# Altium PCB PCB smart home.PcbDoc
Units mm, origin at the board's own origin, x right, y up, seen from the top; angles counter-clockwise.
Board outline 80.26 x 53.85 mm, 2 copper layers (Top Layer, Bottom Layer); 23 components, 35 nets, 125 pads, 28 vias.
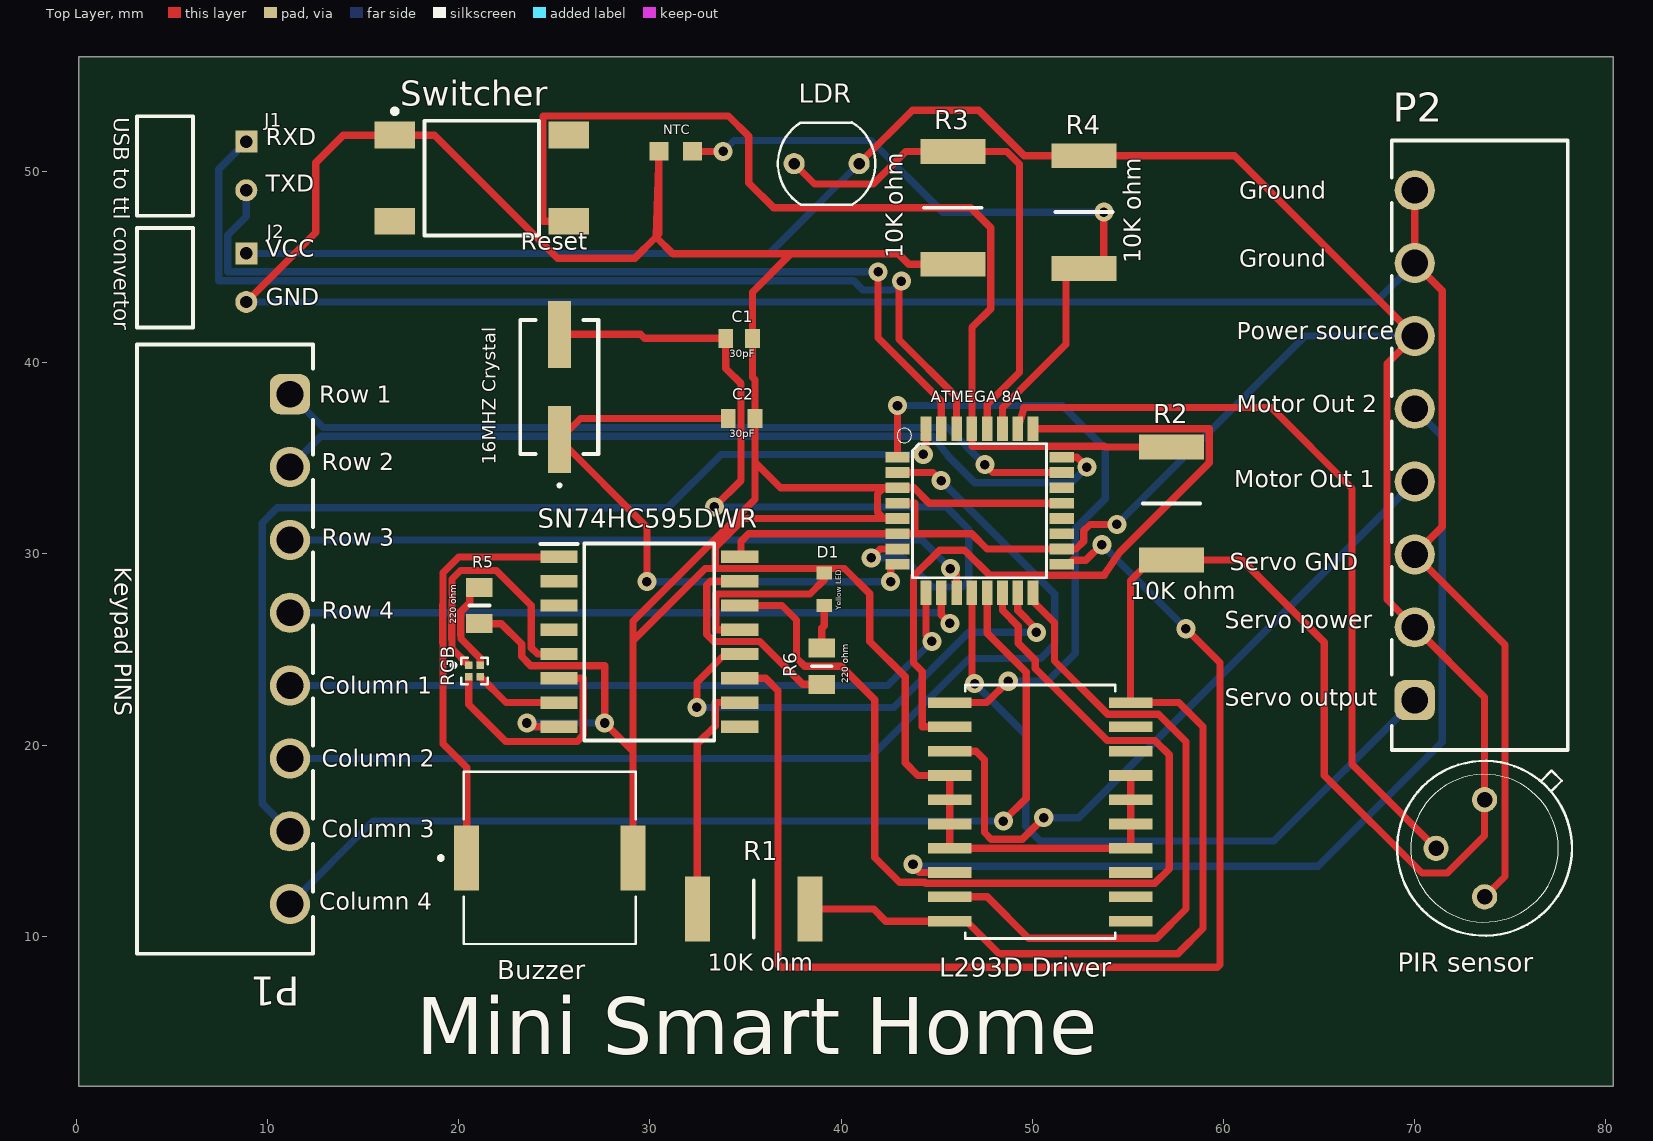
[diagram p0: Top Layer view]
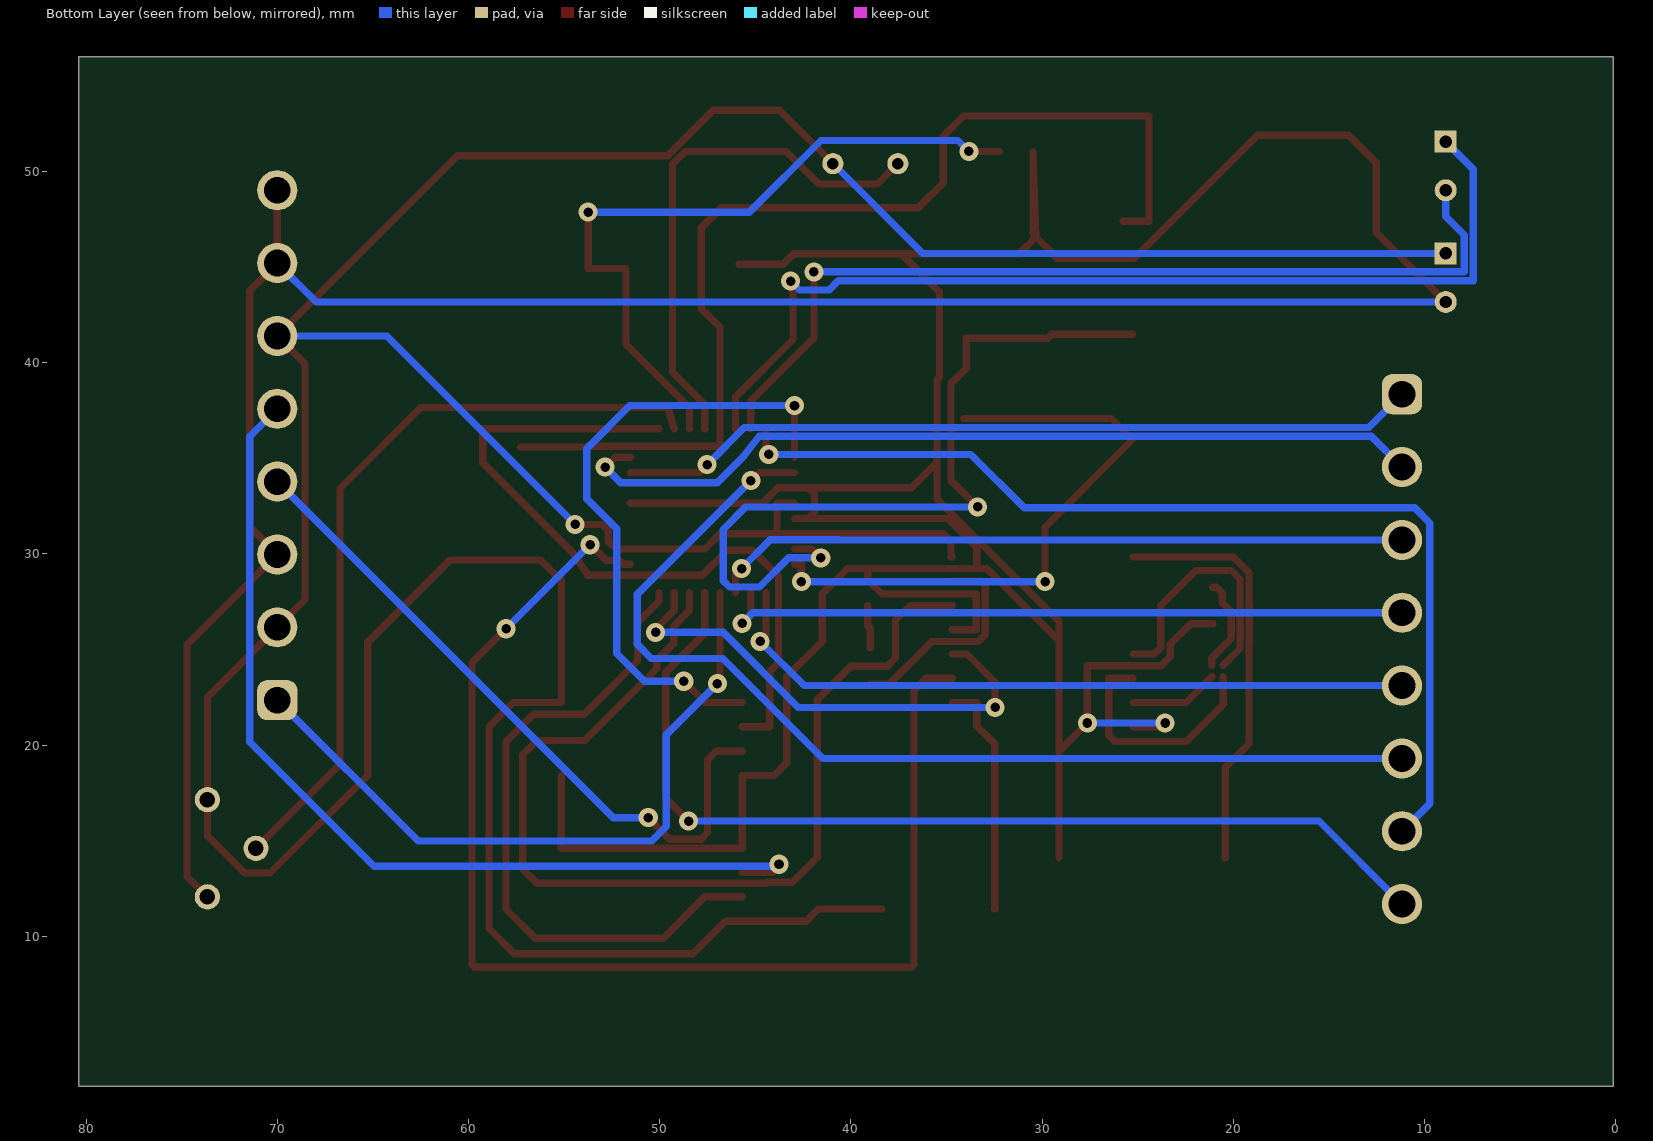
[diagram p1: Bottom Layer view, seen from below]
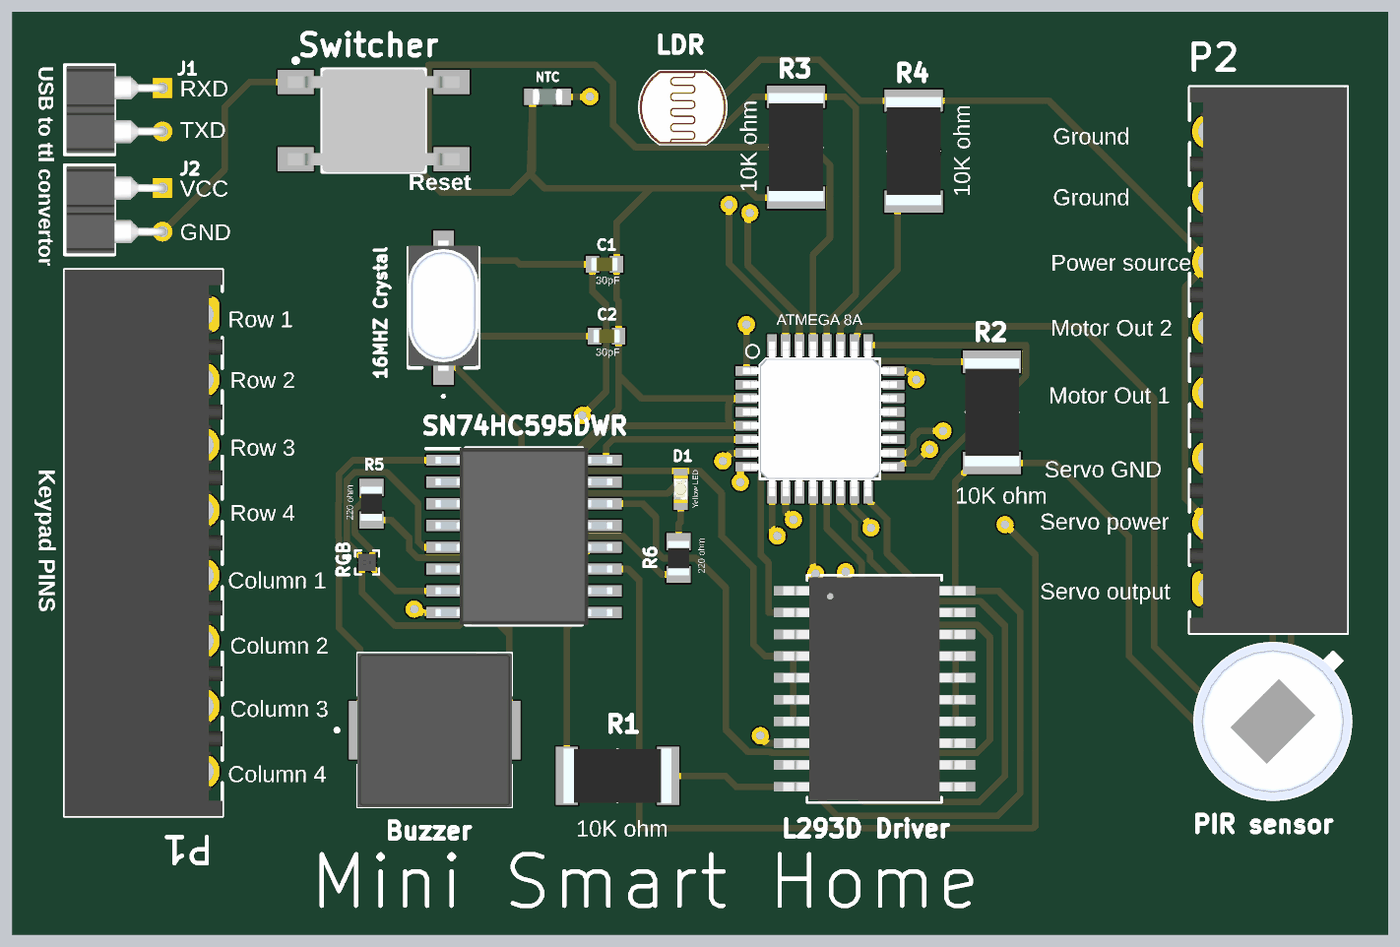
[diagram p2: 3D render of the assembled board from above, using the file's embedded part models]

## Layer stack, top to bottom
Top Solder: solder mask 0.0102, Solder Resist, Dk 3.5
Top Layer: signal copper 0.0356
Dielectric 1: dielectric 0.32, FR-4, Dk 4.8
Bottom Layer: signal copper 0.0356
Bottom Solder: solder mask 0.0102, Solder Resist, Dk 3.5

## Board outline
0.127,2.159 0.127,56.007 80.391,56.007 80.391,2.159

## Design rules (kind name [scope] priority, off if disabled: settings)
BoardOutlineClearance [All] p1: gap=0.3 ignorepadtopadclearanceinfootprint=FALSE except(0.4: Arc-SplitBarrior Arc-SplitContinuation Track-SplitBarrior Track-SplitContinuation SMDPad-SplitBarrior SMDPad-SplitContinuation THPad-SplitBarrior THPad-SplitContinuation Via-SplitBarrior Via-SplitContinuation Fill-SplitBarrior Fill-SplitContinuation Poly-SplitBarrior Poly-SplitContinuation Region-SplitBarrior Region-SplitContinuation Text-SplitBarrior Text-SplitContinuation)
Clearance "Clearance Different Nets" [All] p1: gap=0.2 ignorepadtopadclearanceinfootprint=FALSE except(0.089: Arc-Arc Arc-Track Arc-SMDPad Track-Track Track-SMDPad; 0.127: SMDPad-SMDPad SMDPad-Via THPad-Via Via-Via; 0.254: Arc-Via Arc-Text Track-Via Track-Text SMDPad-Text THPad-Text Via-Text Fill-Text Poly-Text Region-Text Text-Text; 0.5: THPad-THPad Via-Hole)
Clearance "Clearance Same Nets" [All] p2: gap=0.2 ignorepadtopadclearanceinfootprint=FALSE except(0.089: Arc-Arc Arc-Track Arc-SMDPad Track-Track Track-SMDPad SMDPad-SMDPad; 0.127: SMDPad-Via THPad-Via; 0.254: Arc-Via Arc-Text Track-Via Track-Text SMDPad-Text THPad-Text Via-Via Via-Text Fill-Text Poly-Text Region-Text Text-Text)
Clearance "Clearance Bottom Layer" [OnLayer('Bottom Layer')] p3: gap=0.203 ignorepadtopadclearanceinfootprint=TRUE except(0.254: Arc-Text Track-Text SMDPad-Text THPad-Text Via-Text Fill-Text Poly-Text Region-Text Text-Text)
Clearance "Clearance Top Layer" [OnLayer('Top Layer')] p4: gap=0.203 ignorepadtopadclearanceinfootprint=TRUE except(0.254: Arc-Text Track-Text SMDPad-Text THPad-Text Via-Text Fill-Text Poly-Text Region-Text Text-Text)
HoleSize [All] p1: absolutevalues=TRUE maxlimit=6.3 minlimit=0.2 maxpercent=80.000 minpercent=20.000
MinimumAnnularRing [All] p1: minimumring=0.13
MinimumSolderMaskSliver [All] p1: minsoldermaskwidth=0.1
PolygonConnect PolygonConnect_1 [All] p1: thpad.connectstyle=Relief thpad.reliefconductorwidth=0.508 thpad.reliefentries=4 thpad.polygonreliefangle="90 Angle" thpad.airgapwidth=0.254 smdpad.connectstyle=Relief smdpad.reliefconductorwidth=0.508 smdpad.reliefentries=4 smdpad.polygonreliefangle="90 Angle" smdpad.airgapwidth=0.254 via.connectstyle=Direct via.reliefconductorwidth=0.508 via.reliefentries=4 via.polygonreliefangle="90 Angle" via.airgapwidth=0.254
RoutingCorners [All] p1: cornerstyle=Round minsetback=2.54 maxsetback=2.54
RoutingVias [All] p1: holewidth=0.5 width=1 viastyle="Through Hole" minholewidth=0.2 minwidth=0.35 maxholewidth=1 maxwidth=2
SilkToSilkClearance [All] p1: silktosilkclearance=0.1
SilkToSolderMaskClearance [IsPad] p1: minsilkscreentomaskgap=0.1 clearancetoexposedcopper=TRUE
SolderMaskExpansion [All] p1: expansion=0.102 istentingtop=FALSE
SupplyNets "Schematic Supply Nets_1" [InNet('2')] p1: voltage=0.000
SupplyNets "Schematic Supply Nets" [InNet('1')] p2: voltage=0.000
Width [All] p1: maxlimit=2.54 minlimit=0.089 preferedwidth=0.381
25 further rules are at their usual default settings.

## Classes and differential pairs
component class "sch smart home": "16MHZ Crystal" C1 D1 J1 P2 "PIR sensor" R1 SN74HC595DWR Switcher

## Components (designator, comment, footprint, x,y, rotation, side; value= is the part's Value field where it differs from the comment)
"16MHZ Crystal" "16MHZ crystal" "16MHZ crystal" 25.273,38.735 r90 top (schematic designator Y?)
Buzzer "NTC smd" "NTC smd" 31.369,51.054 r0 top (schematic designator *)
C1 "30pF Capcitor" "30pF Capcitor" 34.671,41.275 r180 top (schematic designator C?)
C2 "30pF Capcitor" "30pF Capcitor" 34.798,37.084 r180 top (schematic designator C?)
D1 "LED" LED 39.116,28.155 r90 top (schematic designator D?)
J1 "399-43-102-10-003000" FP-399-43-102-10-003000-MFG 4.699,44.45 r270 top (schematic designator J?)
J2 "399-43-102-10-003000" FP-399-43-102-10-003000-MFG 4.699,50.292 r270 top (schematic designator J?)
"L293D Driver" "Driver L293D" L293D 50.419,16.51 r0 top (schematic designator *)
LDR "LDR sensor" "LDR sensor" 39.243,50.419 r0 top (schematic designator *)
"Mini Smart Home" "Buzzer smd" "buzzer smd" 24.765,14.097 r0 top (schematic designator *)
NTC "ATMEGA 8A SMD" "ATMEGA 8A SMD" 47.244,32.258 r0 top (schematic designator *)
P1 "691701340008B" 691701340008B 7.776,25.019 r270 top (schematic designator P?)
P2 "691701340008B" 691701340008B 73.406,35.687 r90 top (schematic designator P?)
"PIR sensor" "PIR sensor" "PIR sensor" 73.66,14.605 r180 top (schematic designator *)
R1 "10K ohm" "10k OHM" 35.433,11.43 r0 top (schematic designator R?)
R2 "10K ohm" "10k OHM" 57.277,32.639 r90 top (schematic designator R?)
R3 "10K ohm" "10k OHM" 45.847,48.104 r90 top (schematic designator R?)
R4 "10K ohm" "10k OHM" 52.705,47.879 r90 top (schematic designator R?)
R5 "220 ohm" "220 OHM" 21.082,27.305 r270 top (schematic designator R?)
R6 "220 ohm" "220 OHM" 38.989,24.13 r90 top (schematic designator R?)
RGB "RGB LED" "RGB LED" 20.828,23.876 r0 top (schematic designator *)
SN74HC595DWR "SN74HC595DWR" HC595N 29.972,25.4 r0 top (schematic designator IC?)
Switcher "FSM4JSMA" TECO-FSM4JSMA_V 21.209,49.657 r90 top (schematic designator SW?)

## Footprints (in the part's own frame and the unit in brackets; to place one, negate y for a bottom-side part, rotate by r counter-clockwise, add the part's x,y. Pads: shape width x height; smd on the part's side, far side on the other; paste and mask are expansions set on the pad)
"10k OHM" [mm]
  rect 1.3x3.4 smd: 1(-2.95,0) 2(2.95,0)
  silkscreen extent 0,-1.5 0,1.5, body extent -3.15,-1.6 3.15,1.6, height 0.7
"16MHZ crystal" [mm]
  rect 3.5x1.2 smd: 1(-2.75,0) 2(2.75,0)
  silkscreen extent -5.2,-2.05 3.5,2.05, body extent -3.67,-2.05 3.93,2.05, height 2.3
"30pF Capcitor" [mm]
  rect 0.78x0.99 smd: 1(-0.7,0) 2(0.7,0)
  body extent -0.8,-0.41 0.8,0.41, height 0.9
"220 OHM" [mm]
  rect 1x1.4 smd: 1(-0.95,0) 2(0.95,0)
  silkscreen extent 0,-0.53 0,0.53, body extent -1,-0.63 1,0.63, height 0.65
691701340008B [mm] "Horizontal PCB Header THR Type, pitch 3.81mm, 08p"
  rrect50% 2.1x2.1 hole 1.4: 1(-13.335,3.4)
  round 2.1 hole 1.4: 2(-9.525,3.4) 3(-5.715,3.4) 4(-1.905,3.4) 5(1.905,3.4) 6(5.715,3.4) 7(9.525,3.4) 8(13.335,3.4)
  silkscreen extent -15.93,-4.6 15.93,4.6, body extent -15.93,-4.6 15.94,4.6, height 7.4
"ATMEGA 8A SMD" [mil]
  rect 50x22 smd: 1(-169,110.24) 2(-169,78.74) 3(-169,47.24) 4(-169,15.75) 5(-169,-15.75) 6(-169,-47.24) 7(-169,-78.74) 8(-169,-110.24) 17(169,-110.24) 18(169,-78.74) 19(169,-47.24) 20(169,-15.75) 21(169,15.75) 22(169,47.24) 23(169,78.74) 24(169,110.24)
  rect 22x50 smd: 9(-110.24,-169) 10(-78.74,-169) 11(-47.24,-169) 12(-15.75,-169) 13(15.75,-169) 14(47.24,-169) 15(78.74,-169) 16(110.24,-169) 25(110.24,169) 26(78.74,169) 27(47.24,169) 28(15.75,169) 29(-15.75,169) 30(-47.24,169) 31(-78.74,169) 32(-110.24,169)
  silkscreen extent -170,-138 138,170, body extent -177,-177 177,177, height 47
"buzzer smd" [mm]
  rect 1.3x3.4 smd: 1(-4.35,0) 2(4.35,0)
  silkscreen extent -5.8,-4.5 4.5,4.5, body extent -4.5,-4.5 4.5,4.5, height 1.77
FP-399-43-102-10-003000-MFG [mm]
  rect 1.15x1.15 hole 0.65 paste-2539.97 mask+0: 1(-1.27,4.191)
  round 1.15 hole 0.65 paste-2539.97 mask+0: 2(1.27,4.191)
  silkscreen extent -2.6,-1.52 2.6,1.4, body extent -2.7,-1.62 2.7,4.87, height 0.25
HC595N [mm]
  rect 1.95x0.65 smd: 1(-4.725,4.445) 2(-4.725,3.175) 3(-4.725,1.905) 4(-4.725,0.635) 5(-4.725,-0.635) 6(-4.725,-1.905) 7(-4.725,-3.175) 8(-4.725,-4.445) 9(4.725,-4.445) 10(4.725,-3.175) 11(4.725,-1.905) 12(4.725,-0.635) 13(4.725,0.635) 14(4.725,1.905) 15(4.725,3.175) 16(4.725,4.445)
  silkscreen extent -5.7,-5.15 3.4,5.15, body extent -5.15,-5.15 5.15,5.15, height 2.65
L293D [mil]
  rect 90x22 smd paste+0 mask+0: 1(-186.5,225) 2(-186.5,175) 3(-186.5,125) 4(-186.5,75) 5(-186.5,25) 6(-186.5,-25) 7(-186.5,-75) 8(-186.5,-125) 9(-186.5,-175) 10(-186.5,-225) 11(186.5,-225) 12(186.5,-175) 13(186.5,-125) 14(186.5,-75) 15(186.5,-25) 16(186.5,25) 17(186.5,75) 18(186.5,125) 19(186.5,175) 20(186.5,225)
  silkscreen extent -154,-261 154,261, body extent -209,-256 209,256, height 104
"LDR sensor" [mm]
  round 1.108 hole 0.6: 1(-1.7,0) 2(1.7,0)
  silkscreen extent -2.54,-2.16 2.54,2.16, body extent -2.54,-2.15 2.54,2.15, height 2.39
LED [mm]
  rect 0.7x0.8 smd: 1(-0.85,0) 2(0.85,0)
  body extent -0.8,-0.4 0.8,0.4, height 0.95
"NTC smd" [mm]
  rect 1x0.97 smd: 1(-0.889,0) 2(0.861,0)
  body extent -0.89,-0.48 0.86,0.48
"PIR sensor" [mil]
  round 52 hole 32: 1(0,-100) 2(100,0) 3(0,100)
  silkscreen extent -180,-180 180,180, body extent -181,-181 181,181, height 194
"RGB LED" [mm]
  rect 0.4x0.4 smd: 1(-0.3,0.3) 2(-0.3,-0.3) 3(0.3,-0.3) 4(0.3,0.3)
  silkscreen extent -1.2,-0.7 0.7,0.7, body extent -0.5,-0.5 0.5,0.5, height 0.7
TECO-FSM4JSMA_V [mm] "SMD, 4-Leads, Body 6x6mm, Pitch 4.5mm"
  rect 1.4x2.1 smd: 1(2.25,4.55) 2(2.25,-4.55) 3(-2.25,4.55) 4(-2.25,-4.55)
  silkscreen extent -3,-3 3.62,4.67, body extent -3,-5 3,5, height 5.08

## Part data
"16MHZ Crystal": "Crystal or Oscillator", Arrow Part Number=ECS-160-20-3X-TR, Manufacturer_Name=ECS, Mouser Part Number=520-160-20-3XT, Arrow Price/Stock=https://www.arrow.com/en/products/ecs-160-20-3x-tr/ecs-international?region=nac, Datasheet Link=https://www.arrow.com/en/products/ecs-160-20-3x-tr/ecs-international, Height=2.3mm, Manufacturer_Part_Number=ECS-160-20-3X-TR, Mouser Price/Stock=https://www.mouser.co.uk/ProductDetail/ECS/ECS-160-20-3X-TR?qs=7Z%2FjUg96RbU1ElbRFXn8Rw%3D%3D
Buzzer: Manufacturer="Panasonic Electronic Components", Manufacturer Part Number=ERT-JZEG103FA, Supplier Part Number=P124053DKR-ND, Supplier="Ultra Librarian"
C1 C2: "Capacitor", Manufacturer_Name="Kyocera AVX", Manufacturer_Part_Number=06031A300FAT2A, Mouser Part Number=581-06031A300FAT2A, Datasheet Link=https://componentsearchengine.com/Datasheets/1/06031A100FAT2A.pdf, Height=0.9mm, Mouser Price/Stock=https://www.mouser.co.uk/ProductDetail/KYOCERA-AVX/06031A300FAT2A?qs=0IpgBZdgZcpQvPd025dd0w%3D%3D
D1: "LED YELLOW CLEAR 0603 SMD", Case/Size Code=0603, Emitting Color=Amber, Forward Voltage=2V, Manufacturer="Wurth Elektronik", Manufacturer Part Number=150060AS75000, Operating Temperature Max=85°C, Operating Temperature Min=-40°C, Supplier Part Number=732-12013-6-ND, Category="Signal LEDs", Chip Technology=AlInGaP, ComponentLink1Description="Website Link", ComponentLink1URL=https://www.we-online.com/redexpert/article/150060AS75000?ad, ComponentLink2Description="Datasheet Link", ComponentLink2URL=https://www.we-online.com/redexpert/spec/150060AS75000?ad, Dominant Wavelength=605nm, Height=0.7mm, Length=1.6mm, Luminous Intensity=130mcd, Match Code=WL-SMCW, Mount="Surface Mount", Packaging="Tape and Reel", Peak Wavelength=610nm, Supplier=SnapMagic, Viewing Angle=140°, Width=0.8mm
J1 J2: library part CMP-07791-000017-1, "CONN RCPT 2POS 0.1 GOLD PCB R/A", Color=Black, Package Quantity=1, Connector Type=Receptacle, Contact Plating=Gold, Mount="Through Hole", Number of Positions=2, Number of Rows=1, Packaging=Bulk, Pitch=0.1inch, RoHS Compliant=Yes, Termination=Solder
"L293D Driver": "IC MTR DRV BIPOLR 4.5-36V 20SOIC", Manufacturer=STMmicroelectronics, Manufacturer Product Number=L293DD, Supplier Part Number=497-1390-5-ND, Supplier="Ultra librarian"
LDR: "PHOTO CELL (CDS PHOTORESISTOR)", Manufacturer="Adafruit Industries LLC", Manufacturer Product Number=161, Supplier Part Number=1528-2141-ND, Supplier=SnapMagic
"Mini Smart Home": Manufacturer="Murata Electronics", Manufacturer Product Number=PKMCS0909E4000-R1, Supplier Part Number=490-9647-6-ND, Supplier="Ultra Librarian"
P1 P2: library part CMP-1502-02009-2, Color=Black, Current Rating=10A, Voltage Rating=300V, Connector Type="Terminal Block", Contact Material=Brass, Contact Plating=Tin, Gender=Male, Housing Material=Polymer, Lead Pitch=3.81mm, Mount="Through Hole", NexarPartId=22866725, Number of Contacts=8, Number of Pins=8, Packaging="Tape and Reel", REACH SVHC=Unknown, RoHS=Compliant, Termination=PCB
"PIR sensor": Manufacturer=Zilog, Manufacturer Product Number=ZRE200GE, Supplier Part Number=269-4955-ND, Supplier=SnapMagic
R1 R2 R3 R4: "Resistor", Manufacturer_Name=Bourns, Manufacturer_Part_Number=CR2512AJW-103ELF, Mouser Part Number=652-CR2512AJW-103ELF, Datasheet Link=https://www.bourns.com/docs/product-datasheets/crxxxxa.pdf, Height=0.7mm, Mouser Price/Stock=https://www.mouser.co.uk/ProductDetail/Bourns/CR2512AJW-103ELF?qs=GedFDFLaBXEqggePGBQmuQ%3D%3D
R5 R6: "Resistor", Arrow Part Number=WR08X2200FTL, Manufacturer_Name="Walsin Technology Corporation", Arrow Price/Stock=https://www.arrow.com/en/products/wr08x2200ftl/walsin-technology, Datasheet Link=https://www.arrow.com/en/products/wr08x2200ftl/walsin-technology, Manufacturer_Part_Number=WR08X2200FTL
RGB: "LED RGB 0404 SMD", Manufacturer="Cree LED", Manufacturer Product Number=UHD1110-FKA-CL1A13R3Q1BBQFMF3, Supplier Part Number=UHD1110-FKA-CL1A13R3Q1BBQFMF3DKR-ND, Supplier=SnapMagic
SN74HC595DWR: "Integrated Circuit", Manufacturer_Name="Texas Instruments", Mouser Part Number=595-SN74HC595DWR, Manufacturer_Part_Number=SN74HC595DWR, Supplier="Texas Instruments", Supplier Part Number=SN74HC595DWR
Switcher: library part CMP-2000-05602-2, "Swicth, SPST, 24 V, -35 to 85 degC, 4-Pin SMD, RoHS, Tape and Reel", Case\/Package=SMD/SMT, Contact Current Rating=50mA, Contact Resistance=100mOhm, Manufacturer="TE Connectivity", Max Operating Temperature=85degC, Max Voltage Rating (DC)=12V, Min Operating Temperature=-35degC, Operating Force=1.57N, Package Description="4-Pin Surface Mount Device, Body 6 x 6 mm, Pitch 4.5 mm", Package Quantity=750, Voltage Rating=24V, Actuator Length=0.055inch, Actuator Material=Polyamide, Contact Material=CopperAlloy, Contact Plating=Silver, Current Rating=50mA, Datasheet URL=http://www.te.com/commerce/DocumentDelivery/DDEController?Action=showdoc&DocId=Customer+Drawing%7F2-1437565-7%7FV%7Fpdf%7FEnglish%7FENG_CD_2-1437565-7_V.pdf%7F4-1437565-2, Datasheet Version="Rev. V, 02/2015", Electrical Life=100000Cycles, Illumination Type=Illuminated, Length=6mm, Manufacturer URL=http://www.te.com/, Mechanical Life=100000Cycles, Mount=SurfaceMount, Mounting Technology=SurfaceMount, Orientation=Straight, Package Reference=FSM4JSMA, Packaging=LoosePiece, REACH SVHC=Unknown, RoHSCompliant=true, Switch Travel=0.25mm, Termination=GullWing, Throw Configuration=SPST, Voltage Rating (DC)=24V, Width=6mm

## Via types
v1: diameter 1, hole 0.5, Top Layer to Bottom Layer, 28 vias

## Nets (pads, with @x,y where several pads share a name; then routed paths per layer and width w, separated by ;. In a path a pad name is that pad's centre, name@x,y a point inside that pad or via, vN(x,y) a via of type N, cw(c..) or ccw(c..) an arc to the next point about the centre after c; other vN are vias at no path point)
1: "L293D Driver.10" "L293D Driver.20" "PIR sensor.1" J1.1 LDR.2 NTC.4 NTC.6 NTC.18 P2.2 P2.6 R1.2 R2.1 R4.2 SN74HC595DWR.16 | length 216
  Top Layer w0.381: SN74HC595DWR.16 34.773,29.845 34.773,30.67 35.16,31.058 NTC.6 43.866,31.058 ; R1.2 41.707,11.43 42.342,10.795 45.682,10.795 46.558,10.795 48.258,9.095 57.609,9.095 58.928,10.414 58.928,20.955 57.658,22.225 55.156,22.225 55.143,22.225 55.143,28.597 56.236,29.689 R2.1 60.964,29.689 65.278,25.375 65.278,18.415 70.383,13.31 71.704,13.31 73.66,15.265 73.66,17.145 73.66,22.508 P2.2 68.555,27.613 68.555,39.951 P2.6 60.579,50.829 R4.2 49.581,50.829 47.197,53.213 43.737,53.213 LDR.2 ; NTC.4 43.866,32.658 43.866,31.058 ; v1(54.424,31.545) 53.023,31.545 52.7,31.223 52.7,30.67 52.288,30.258 NTC.18 47.638,30.258 46.838,31.058 43.866,31.058
  Bottom Layer w0.381: J1.1 36.244,45.72 LDR.2 ; v1(54.424,31.545) 64.281,41.402 P2.6
2: "L293D Driver.4" "L293D Driver.5" "L293D Driver.6" "L293D Driver.7" "L293D Driver.14" "L293D Driver.15" "L293D Driver.16" "L293D Driver.17" "Mini Smart Home.2" "PIR sensor.3" Buzzer.1 C1.1 C2.1 D1.2 J1.2 NTC.3 NTC.5 NTC.21 P2.3 P2.7 P2.8 R3.1 R5.2 SN74HC595DWR.8 SN74HC595DWR.13 Switcher.1 | length 295.4
  Top Layer w0.381: J1.2 12.522,46.812 12.522,50.459 13.97,51.907 Switcher.1 18.73,51.907 25.171,45.466 29.21,45.466 30.324,46.58 ; R5.2 22.225,26.355 23.292,25.288 23.292,24.638 23.774,24.155 27.635,24.155 v1(27.635,21.158) 29.115,19.678 ; v1(23.571,21.158) 23.774,20.955 SN74HC595DWR.8 ; 29.115,14.097 29.115,19.678 ; SN74HC595DWR.13 33.443,26.035 33.443,27.909 38.374,27.909 39.116,28.651 D1.2 D1.2@39.116,29.235 ; NTC.5 42.227,31.858 ; R3.1 43.534,45.154 42.988,45.699 37.375,45.699 ; NTC.21 44.615,32.658 43.815,33.458 NTC.3 42.227,33.458 ; 55.156,18.415 55.156,17.145 55.156,15.875 55.156,14.605 45.682,14.605 45.682,15.875 45.682,17.145 45.682,18.415 44.018,18.415 43.353,19.08 43.353,23.57 41.506,25.417 41.506,27.912 40.183,29.235 D1.2@39.116,29.235 ; P2.8 P2.7 71.45,43.768 71.45,31.416 P2.3 74.727,25.251 74.727,13.132 73.66,12.065 ; 29.115,19.678 29.115,25.454 ; 29.115,25.454 29.115,26.473 35.498,32.856 35.498,34.79 ; 29.115,25.454 32.896,29.235 33.426,29.235 ; 30.324,46.58 Buzzer.1 30.48,46.736 30.324,46.58 ; 30.324,46.58 31.205,45.699 37.375,45.699 ; 33.426,29.235 D1.2@39.116,29.235 ; 33.426,29.235 33.426,30.353 34.931,31.858 42.227,31.858 ; 35.498,34.79 36.83,33.458 42.227,33.458 ; 35.498,34.79 C2.1 35.498,39.116 35.371,39.243 C1.1 35.371,43.695 37.375,45.699 ; 42.227,31.858 41.91,32.176 41.91,33.14 42.227,33.458
  Bottom Layer w0.381: J1.2 67.974,43.18 P2.7 ; v1(23.571,21.158) v1(27.635,21.158)
blue: RGB.3 SN74HC595DWR.7 | length 4.7
  Top Layer w0.381: RGB.3 22.479,22.225 SN74HC595DWR.7
column1: NTC.9 P1.5 | length 37.2
  Top Layer w0.381: NTC.9 44.444,25.734 v1(44.752,25.425)
  Bottom Layer w0.381: P1.5 42.441,23.114 v1(44.752,25.425)
column2: NTC.2 P1.6 | length 56
  Top Layer w0.381: NTC.2 44.812,34.258 v1(45.237,33.833)
  Bottom Layer w0.381: P1.6 41.478,19.304 46.711,24.536 50.444,24.536 51.181,25.273 51.181,27.889 v1(45.237,33.833)
column3: NTC.32 P1.7 | length 54.2
  Top Layer w0.381: v1(44.298,35.204) 44.444,35.351 NTC.32
  Bottom Layer w0.381: P1.7 9.728,16.942 9.728,31.623 10.516,32.41 30.937,32.41 33.731,35.204 v1(44.298,35.204)
column4: NTC.13 P1.8 | length 52.4
  Top Layer w0.381: NTC.13 47.644,25.852 49.687,23.809 49.687,17.226 v1(48.489,16.027)
  Bottom Layer w0.381: P1.8 15.519,16.027 v1(48.489,16.027)
DS: NTC.14 SN74HC595DWR.14 | length 54.3
  Top Layer w0.381: SN74HC595DWR.14 36.906,27.305 37.668,26.543 37.668,24.562 38.1,24.13 40.005,24.13 41.758,22.377 41.758,14.122 43.053,12.827 44.372,12.827 44.423,12.776 56.415,12.776 57.161,13.522 57.161,19.498 56.415,20.244 53.924,20.244 50.157,24.011 50.157,24.441 49.268,25.33 49.268,26.226 48.444,27.05 NTC.14
EN2: "L293D Driver.1" NTC.1 | length 33.5
  Top Layer w0.381: NTC.1 v1(42.951,37.761) ; 45.682,22.225 47.625,22.225 v1(48.743,23.343)
  Bottom Layer w0.381: v1(42.951,37.761) 51.57,37.761 53.823,35.509 53.823,32.893 52.248,31.318 52.248,24.79 50.8,23.343 v1(48.743,23.343)
green: RGB.2 SN74HC595DWR.6 | length 12.6
  Top Layer w0.381: RGB.2 20.528,22.123 22.458,20.193 26.2,20.193 26.518,20.511 26.518,23.495 SN74HC595DWR.6
in1: "L293D Driver.2" NTC.25 | length 39.7
  Top Layer w0.381: 45.682,20.955 44.247,20.955 44.247,23.851 43.79,24.308 43.79,28.829 45.161,30.201 46.457,30.201 47.777,28.88 53.76,28.88 54.598,30.112 59.258,34.773 59.258,36.551 NTC.25
in2: "L293D Driver.9" NTC.16 | length 35.3
  Top Layer w0.381: 45.682,12.065 47.65,12.065 49.809,9.906 56.515,9.906 58.039,11.43 58.039,20.18 56.604,21.615 53.95,21.615 53.899,21.666 53.897,21.666 53.734,21.83 53.734,21.831 51.16,24.405 51.16,26.405 50.044,27.521 NTC.16
LDR: LDR.1 NTC.28 R3.2 | length 27.7
  Top Layer w0.381: LDR.1 38.61,49.352 41.681,49.352 43.383,51.054 R3.2 48.666,51.054 49.332,50.389 49.332,39.508 47.644,37.821 NTC.28
Net*_1: "Mini Smart Home.1" SN74HC595DWR.1 | length 21.9
  Top Layer w0.381: 20.415,14.097 20.415,18.828 19.177,20.066 19.177,25.336 19.163,25.35 19.163,27.36 19.177,27.374 19.177,29.019 20.002,29.845 SN74HC595DWR.1
Net*_4: R5.1 RGB.4 | length 5
  Top Layer w0.381: R5.1 20.882,28.255 20.572,27.946 20.572,27.441 20.103,26.971 20.103,25.739 20.117,25.725 20.117,25.561 21.128,24.55 RGB.4
Net*_7: "16MHZ Crystal.2" C1.2 NTC.7 | length 42.4
  Top Layer w0.381: 25.273,41.485 29.515,41.485 29.725,41.275 C1.2 33.971,39.7 34.773,38.899 34.773,33.858 v1(33.376,32.461) ; v1(41.58,29.794) 42.044,30.258 NTC.7
  Bottom Layer w0.381: v1(33.376,32.461) 45.504,32.461 46.685,31.28 46.685,28.6 46.355,28.27 44.78,28.27 43.256,29.794 v1(41.58,29.794)
Net*_8: "16MHZ Crystal.1" C2.2 NTC.8 | length 32.6
  Top Layer w0.381: v1(29.845,28.55) 29.845,31.413 25.273,35.985 26.372,37.084 C2.2 ; v1(42.596,28.55) 42.596,29.458 NTC.8
  Bottom Layer w0.381: v1(29.845,28.55) v1(42.596,28.55)
Net*_29: NTC.29 R2.2 Switcher.4 | length 56.4
  Top Layer w0.381: Switcher.4 24.409,47.407 24.409,52.908 34.112,52.908 35.179,51.841 35.179,49.403 36.474,48.108 46.787,48.108 47.828,47.066 47.828,42.824 46.844,41.84 NTC.29 46.844,35.636 53.775,35.636 53.823,35.589 R2.2
NetD?_1: D1.1 R6.2 | length 2.3
  Top Layer w0.381: R6.2 38.989,26.111 39.116,26.238 D1.1
NetIC?_10: R1.1 SN74HC595DWR.10 | length 12.5
  Top Layer w0.381: R1.1 32.483,20.071 33.415,21.003 33.415,22.225 SN74HC595DWR.10
NTC: Buzzer.2 NTC.27 R4.1 | length 38
  Top Layer w0.381: Buzzer.2 v1(33.83,51.054) ; NTC.27 48.444,37.649 51.765,40.97 51.765,44.929 R4.1 53.746,44.929 v1(53.746,47.879)
  Bottom Layer w0.381: v1(33.83,51.054) 34.402,51.625 41.567,51.625 45.314,47.879 v1(53.746,47.879)
out1: "L293D Driver.3" P2.4 | length 36.2
  Top Layer w0.381: 45.682,19.685 47.053,19.685 47.498,19.241 47.498,15.43 47.846,15.083 49.479,15.083 v1(50.602,16.205)
  Bottom Layer w0.381: v1(50.602,16.205) 52.429,16.205 P2.4
out2: "L293D Driver.8" P2.5 | length 50.6
  Top Layer w0.381: v1(43.764,13.772) 43.764,13.665 44.094,13.335 45.682,13.335
  Bottom Layer w0.381: v1(43.764,13.772) 43.871,13.665 64.948,13.665 71.45,20.168 71.45,36.148 P2.5
PIR: "PIR sensor.2" NTC.26 | length 40.7
  Top Layer w0.381: NTC.26 49.561,37.655 62.497,37.655 66.726,33.426 66.726,18.999 71.12,14.605
red: RGB.1 SN74HC595DWR.5 | length 13.8
  Top Layer w0.381: RGB.1 19.647,25.057 19.647,25.53 19.633,25.545 19.633,27.165 19.647,27.18 19.647,28.689 20.091,29.134 21.971,29.134 23.8,27.305 23.8,25.095 24.13,24.765 SN74HC595DWR.5
row1: NTC.23 P1.1 | length 42.1
  Top Layer w0.381: v1(47.523,34.671) 47.936,34.258 NTC.23
  Bottom Layer w0.381: P1.1 12.911,36.619 45.576,36.619 v1(47.523,34.671)
row2: NTC.24 P1.2 | length 45.3
  Top Layer w0.381: NTC.24 52.343,35.058 v1(52.857,34.544)
  Bottom Layer w0.381: P1.2 12.781,36.149 44.8,36.149 45.614,35.103 46.99,33.726 52.04,33.726 v1(52.857,34.544)
row3: NTC.11 P1.3 | length 36.6
  Top Layer w0.381: v1(45.72,29.235) 46.044,28.911 NTC.11
  Bottom Layer w0.381: P1.3 40.631,30.734 40.635,30.739 44.217,30.739 v1(45.72,29.235)
row4: NTC.10 P1.4 | length 36.5
  Top Layer w0.381: NTC.10 45.244,26.823 v1(45.697,26.37)
  Bottom Layer w0.381: P1.4 45.143,26.924 v1(45.697,26.37)
RXD: J2.1 NTC.30 | length 53
  Top Layer w0.381: v1(43.155,44.272) 43.026,44.144 43.026,41.219 46.044,38.202 NTC.30
  Bottom Layer w0.381: J2.1 7.455,50.127 7.455,44.285 40.657,44.285 41.137,43.804 42.686,43.804 v1(43.155,44.272)
SERVO: NTC.12 P2.1 | length 37.1
  Top Layer w0.381: NTC.12 46.844,23.362 v1(46.99,23.216)
  Bottom Layer w0.381: v1(46.99,23.216) 49.657,20.549 49.657,15.748 50.419,14.986 62.64,14.986 P2.1
SH_CP: NTC.17 SN74HC595DWR.11 | length 66.9
  Top Layer w0.381: SN74HC595DWR.11 36.055,23.495 36.703,22.847 36.703,8.52 36.841,8.382 59.679,8.382 59.817,8.52 59.817,24.308 v1(58.039,26.086) ; NTC.17 51.892,29.458 52.101,29.667 52.807,29.667 53.619,30.48 v1(53.645,30.48)
  Bottom Layer w0.381: v1(53.645,30.48) v1(58.039,26.086)
ST_CP: NTC.15 SN74HC595DWR.12 | length 26
  Top Layer w0.381: v1(32.461,21.971) 32.461,23.292 33.934,24.765 SN74HC595DWR.12 ; NTC.15 49.244,27.051 50.216,26.079 v1(50.216,25.9)
  Bottom Layer w0.381: v1(32.461,21.971) 42.756,21.971 46.685,25.9 v1(50.216,25.9)
TXD: J2.2 NTC.31 | length 48.3
  Top Layer w0.381: v1(41.935,44.754) 41.935,41.307 45.244,37.998 NTC.31
  Bottom Layer w0.381: J2.2 8.89,47.651 7.924,46.686 7.924,44.754 v1(41.935,44.754)
yellow: R6.1 SN74HC595DWR.15 | length 11.5
  Top Layer w0.381: SN74HC595DWR.15 33.168,28.575 32.973,28.379 32.973,25.79 33.337,25.425 35.753,25.425 37.998,23.18 R6.1
pads on no net: "L293D Driver.11" "L293D Driver.12" "L293D Driver.13" "L293D Driver.18" "L293D Driver.19" NTC.19 NTC.20 NTC.22 SN74HC595DWR.2 SN74HC595DWR.3 SN74HC595DWR.4 SN74HC595DWR.9 Switcher.2 Switcher.3

## Silkscreen, mask and mechanical layers (free items; w line width, h text height)
Top Overlay:
  text "USB to ttl convertor" at 1.668,52.832 h1.4 r270
  text "RXD" at 9.906,51.054 h1.52
  text "TXD" at 9.906,48.641 h1.52
  text "Ground" at 60.833,48.277 h1.52
  text "Reset" at 23.241,45.609 h1.52
  text "10K ohm" at 43.544,45.466 h1.52 r90
  text "VCC" at 9.907,45.229 h1.52
  text "10K ohm" at 55.99,45.212 h1.52 r90
  text "Ground" at 60.833,44.721 h1.52
  text "GND" at 9.906,42.689 h1.52
  text "Power source" at 60.706,40.91 h1.52
  text "30pF" at 34.163,40.129 h0.7
  text "Row 1" at 12.7,37.608 h1.52
  text "Motor Out 2" at 60.706,37.101 h1.52
  text "30pF" at 34.163,35.938 h0.7
  text "Row 2" at 12.827,34.052 h1.52
  text "Motor Out 1" at 60.579,33.164 h1.52
  text "Row 3" at 12.827,30.116 h1.52
  text "Keypad PINS" at 1.685,29.337 h1.52 r270
  text "Servo GND" at 60.325,28.846 h1.52
  text "10K ohm" at 55.118,27.322 h1.52
  text "Yellow LED" at 40.127,27.051 h0.5 r90
  text "220 ohm" at 19.996,26.354 h0.6 r90
  text "Row 4" at 12.827,26.305 h1.52
  text "Servo power" at 60.071,25.798 h1.52
  text "220 ohm" at 40.506,23.24 h0.6 r90
  text "Column 1" at 12.7,22.369 h1.52
  text "Servo output" at 60.071,21.734 h1.52
  text "Column 2" at 12.827,18.559 h1.52
  text "Column 3" at 12.827,14.876 h1.52
  text "Column 4" at 12.7,11.066 h1.52
  text "10K ohm" at 33.02,7.891 h1.52
Mechanical29:
  the board outline again, w0.254

## Text inside footprints (layer, text, board x,y; h text height)
"L293D Driver": Top 3D Body "*" at 46.685,21.666 h1.27
NTC: Top Overlay "ATMEGA 8A" at 44.704,37.73 h1.02; Mechanical29 "Mind Cloud" at 45.72,31.885 h0.76